# Altium PCB Ada4Arm.PcbDoc
Units mil, origin at the board's own origin, x right, y up, seen from the top; angles counter-clockwise.
Board outline 4750 x 3250 mil, 2 copper layers (Top Layer, Bottom Layer), stack 65.792 mil thick; 28 components, 71 nets, 297 pads, 0 vias.
Unrouted connection lines stored in the file: 94.
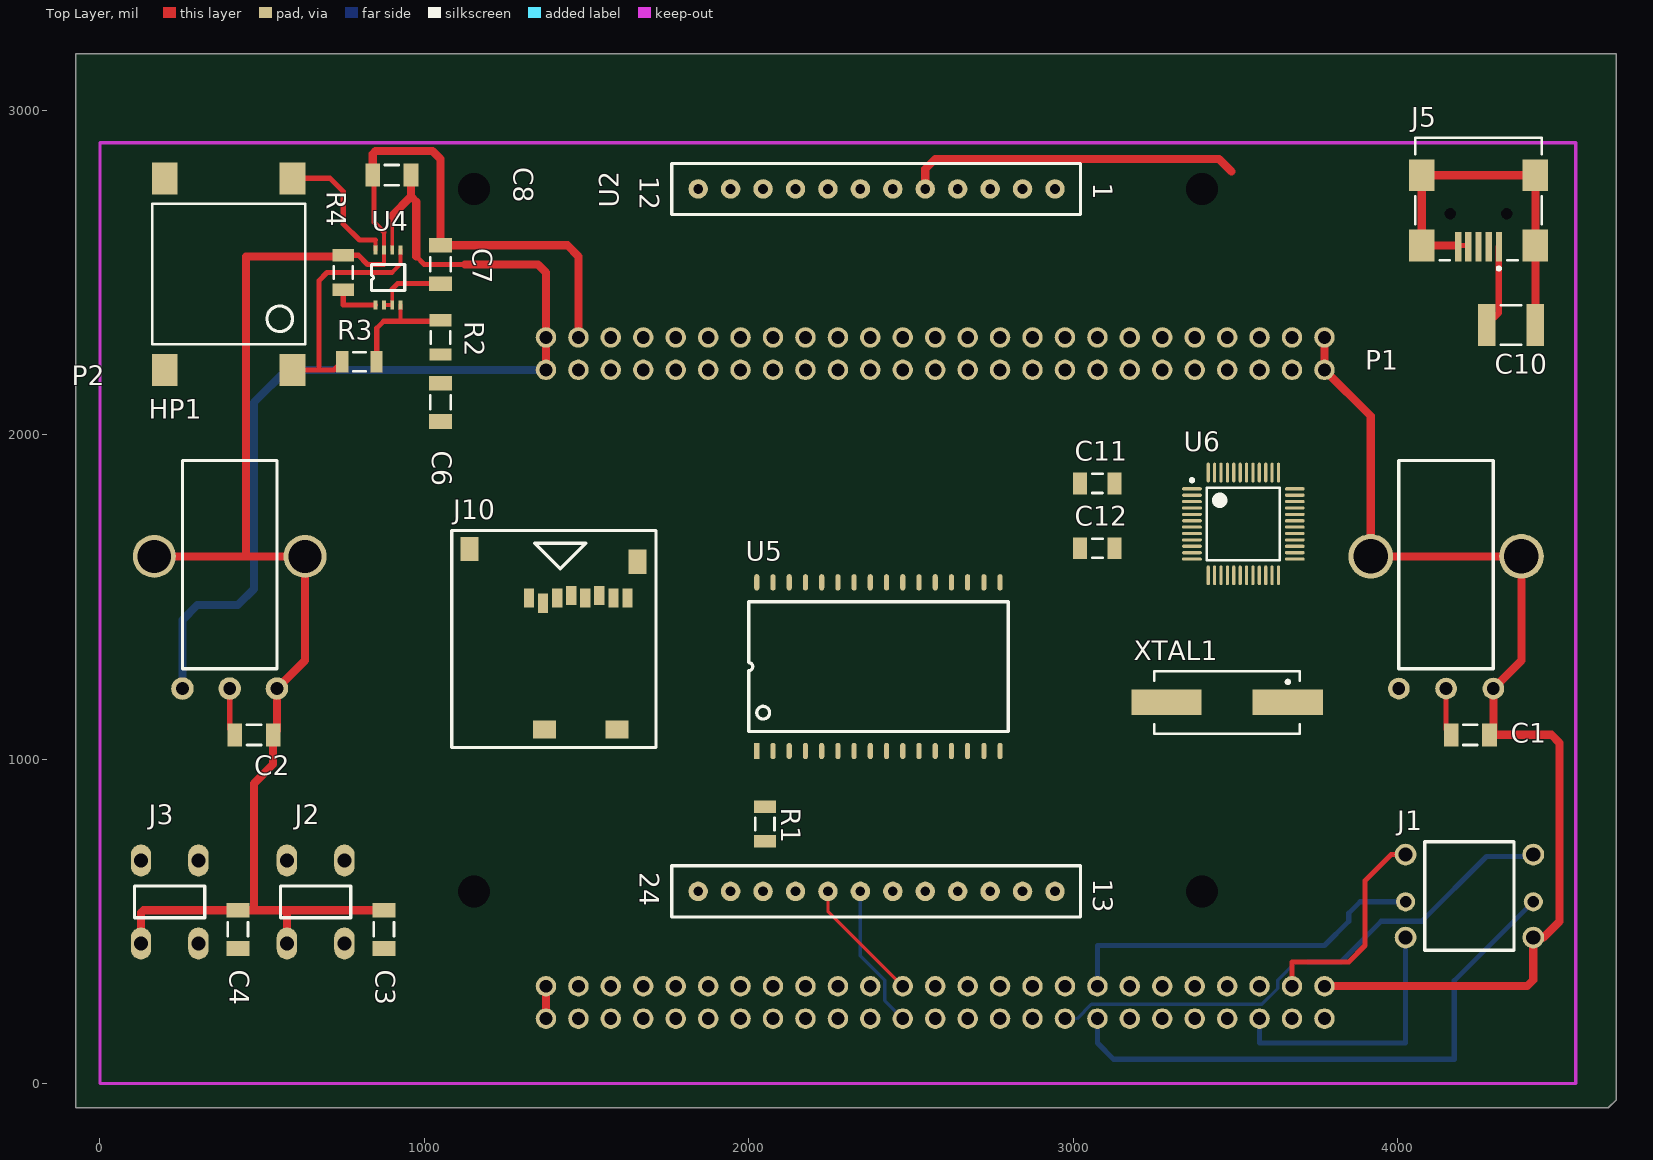
[diagram p0: Top Layer view]
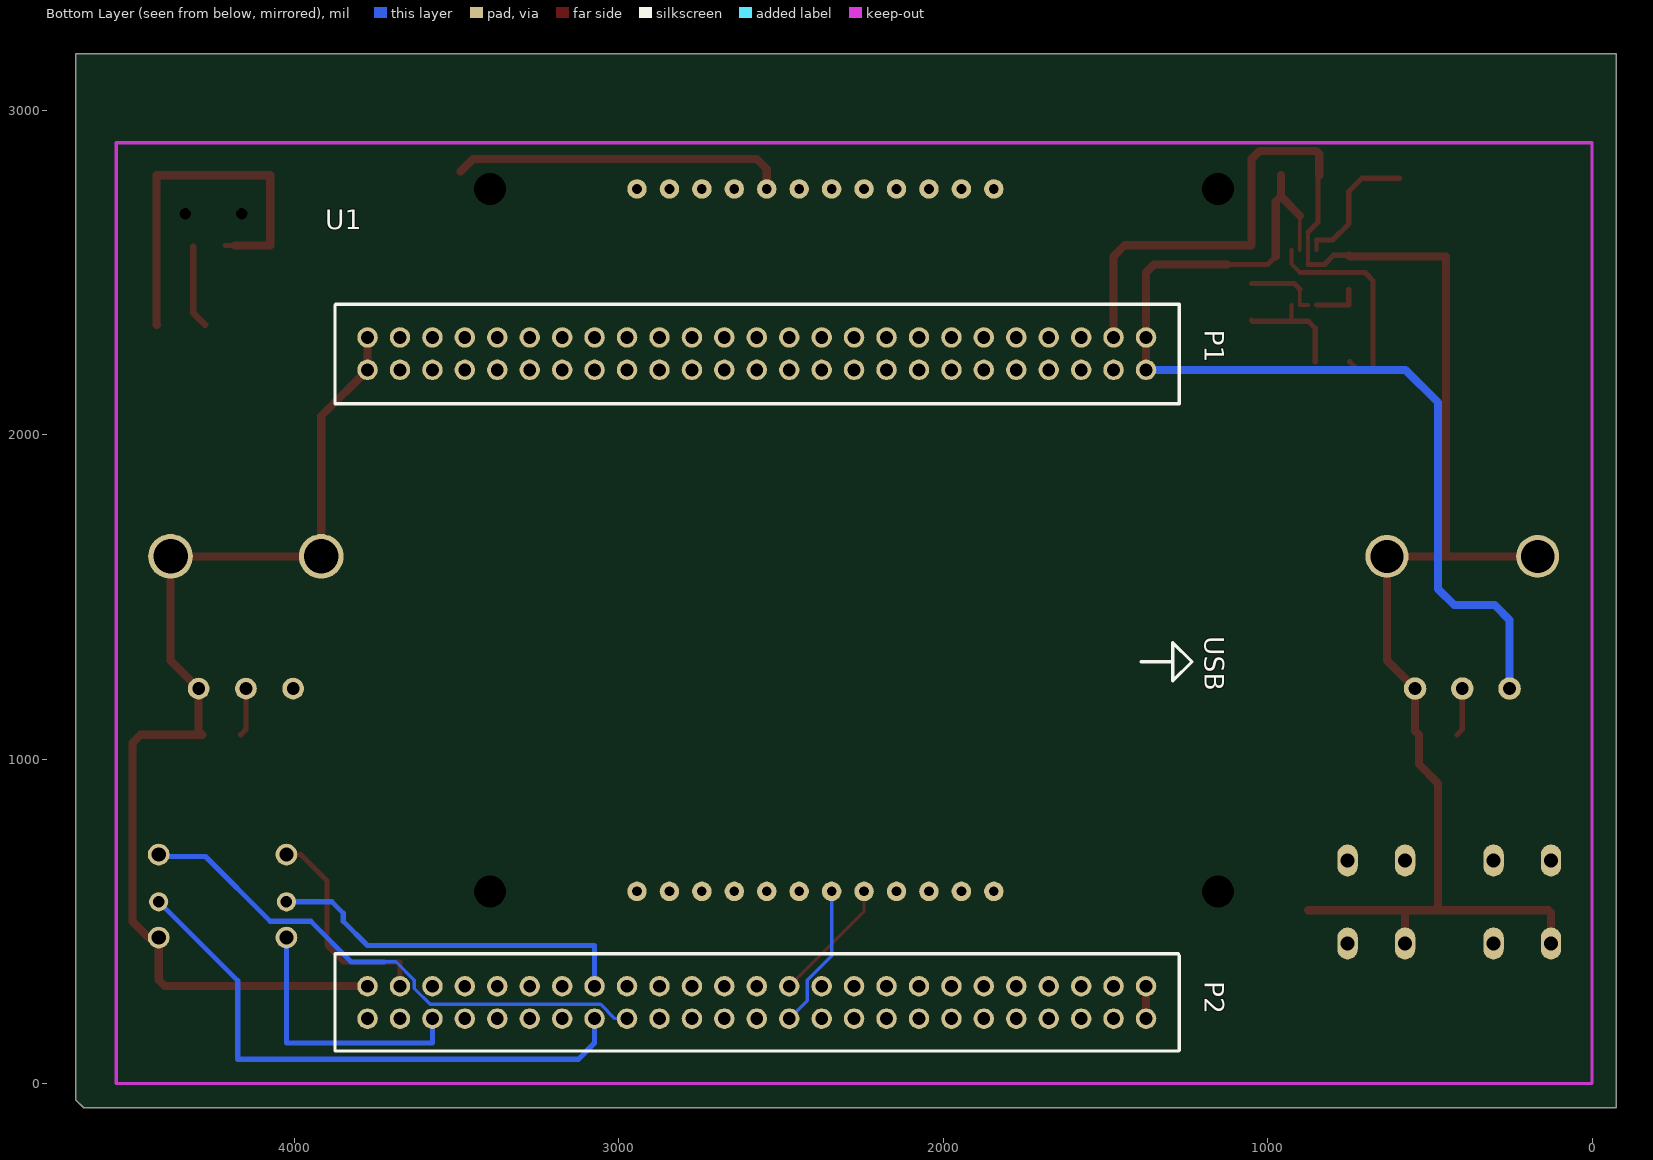
[diagram p1: Bottom Layer view, seen from below]

## Layer stack, top to bottom
Top Layer: signal copper 1.4
Dielectric: core 62.9921, FR-4, Dk 4.8
Bottom Layer: signal copper 1.4

## Board outline
-75,3175 4675,3175 4675,-50 4650,-75 -75,-75

## Design rules (kind name [scope] priority, off if disabled: settings)
Clearance "Polygon Clearance" [InPolygon] p1: gap=16
Clearance [All] p2: gap=7.87
ComponentClearance [All] p1 off: gap=10 collisioncheckmode=3 verticalgap=10 showdistances=FALSE
DiffPairsRouting [All] p1: maxlimit=393.7 minlimit=4.92 mostfreqgap=5.91 maxuncoupledlength=500
FabricationTestPointUsage FabricationTestPointUsage_1 [All] p1: valid=0 allowmultiple=FALSE
FabricationTestpoint FabricationTestpoint_1 [All] p1: side=3 testpointundercomponent=TRUE minsize=40 maxsize=100 preferedsize=60 minholesize=0 maxholesize=40 preferedholesize=32 testpointgrid=1 allowsidetop=TRUE allowsidebottom=TRUE usegrid=TRUE gridtolerance=0.01
HoleSize [All] p1: absolutevalues=TRUE maxlimit=236.22 minlimit=7.87 maxpercent=80.000 minpercent=20.000
HoleSize FabricationTestpoint [All] p2 off: absolutevalues=TRUE maxlimit=100 minlimit=1 maxpercent=80.000 minpercent=20.000
HoleSize FabricationTestPointUsage [All] p3 off: absolutevalues=TRUE maxlimit=100 minlimit=1 maxpercent=80.000 minpercent=20.000
MinimumSolderMaskSliver [All] p1: minsoldermaskwidth=1.93
PlaneClearance [All] p1: clearance=19.68
PlaneConnect [All] p1: planeconnectstyle=Relief reliefexpansion=15.75 reliefentries=4 reliefconductorwidth=5.91 reliefairgap=5.91
PolygonConnect [All] p1: connectstyle=Relief reliefconductorwidth=5.91 reliefentries=4 polygonreliefangle="90 Angle" airgapwidth=10
RoutingCorners [All] p1: cornerstyle=45-Degree minsetback=49.21 maxsetback=49.21
RoutingVias [All] p1: holewidth=23.62 width=34 viastyle="Through Hole" minholewidth=7.87 minwidth=18 maxholewidth=78.74 maxwidth=86.61
SilkscreenOverComponentPads [All] p1: minsilkscreentomaskgap=10
SolderMaskExpansion [All] p1: expansion=2.95
Width [All] p1: maxlimit=393.7 minlimit=8 preferedwidth=16
18 further rules are at their usual default settings.

## Classes and differential pairs
component class Audio_Keys: C1 C2 C3 C4 C6 C7 C8 HP1 J1 J2 J3 P1 P2 R2 R3 R4 U4
component class LCD_SRAM: R1 U2 U5
component class MCU: U1
net class A[0..18]: A0 A1 A2 A3 A4 A5 A6 A7 A8 A9 A10 A11 A12 A13 A14 A15 A16 A17 A18
net class D[0..7]: D0 D1 D2 D3 D4 D5 D6 D7
component class Power_Debug: C10 C11 C12 J5 J10 U6 XTAL1

## Components (designator, comment, footprint, x,y, rotation, side; value= is the part's Value field where it differs from the comment)
C1 "CAP 100nF 16V 1206(3216)" CAPC1206(3216)100_N 4225,1075 r180 top
C2 "CAP 100nF 16V 1206(3216)" CAPC1206(3216)100_N 475,1075 r180 top
C3 "CAP 100nF 16V 1206(3216)" CAPC1206(3216)100_N 875,475 r270 top
C4 "CAP 100nF 16V 1206(3216)" CAPC1206(3216)100_N 425,475 r270 top
C6 "CAP 100nF 16V 1206(3216)" CAPC1206(3216)100_N 1050,2100 r270 top
C7 "CAP 100nF 16V 1206(3216)" CAPC1206(3216)100_N 1050,2525 r90 top
C8 "CAP 100nF 16V 1206(3216)" CAPC1206(3216)100_N 900,2800 r180 top
C10 "Cap Pol3" CAPC4532L 4350,2338.58 r0 top
C11 "Cap Semi" CAPC3216L 3075,1850 r0 top
C12 "Cap Semi" CAPC3216L 3075,1650 r0 top
HP1 "NDT-03C" NDT-03C 200,2200 r90 top
J1 "SKQUCAA010" SKQUCAA010 4025,450 r0 top
J2 "SPST MicroSwitch" SPST_MicroSwitch 675,550 r90 top
J3 "SPST MicroSwitch" SPST_MicroSwitch 225,550 r90 top
J5 "440247-1" 440247 4250,2888.58 r90 top
J10 "3M microSD connector" 2908-05WB-MG 1675,1075 r0 top
P1 "POT Type 51" "POT Type 51"#1 4150,1625 r0 top
P2 "POT Type 51" "POT Type 51"#2 400,1625 r0 top
R1 "10K" RESC1206(3216)_L 2050,800 r270 top
R2 "10K" RESC1206(3216)_L 1050,2300 r90 top
R3 "10K" RESC1206(3216)_L 800,2225 r180 top
R4 "10K" RESC1206(3216)_L 750,2500 r270 top
U1 "STM32F3-DISCOVERY" STM32F3-DISCOVERY 2375,1300 r270 bottom
U2 "INT024BTFT" INT024BTFT 2275,1675 r270 top
U4 "TS4990" MiniSOP-8 850,2400 r90 top
U5 "AS64C4008" SOP32 2025,1025 r90 top
U6 "STM32F103C4T6A" LQFP48_L 3525,1725 r0 top
XTAL1 "HC49/4H_SMX" HC49/4H_SMX 3475,1175 r180 top

## Footprints (in the part's own frame and the unit in brackets; to place one, negate y for a bottom-side part, rotate by r counter-clockwise, add the part's x,y. Pads: shape width x height; smd on the part's side, far side on the other; paste and mask are expansions set on the pad)
2908-05WB-MG [mm] "Connecteur microSD"
  rect 0.8x1.5 smd: 1(-8.94,10.7) 2(-7.84,10.3) 3(-6.74,10.7) 4(-5.64,10.9) 5(-4.54,10.7) 6(-3.44,10.9) 7(-2.34,10.7) 8(-1.24,10.7)
  rect 1.8x1.4 smd: G0(-2.05,0.4) G1(-7.75,0.4)
  rect 1.4x1.9 smd: G2(-0.45,13.55) G3(-13.6,14.55)
  silkscreen extent -15,-1 1,16
440247 [mm] "Connector; USB2.0, Type B, SM; 5 Position; Right Angle"
  rect 2.3x0.5 smd: 1(-7.85,-1.6) 2(-7.85,-0.8) 3(-7.85,0) 4(-7.85,0.8) 5(-7.85,1.6)
  rect 2.5x2 smd: 6(-7.75,4.45) 7(-2.25,4.45) 8(-7.75,-4.45) 9(-2.25,-4.45)
  round 0.6 hole 0.9 unplated: MH1(-5.25,2.2) MH2(-5.25,-2.2)
  silkscreen extent -9.67,-4.95 0.7,4.95
CAPC1206(3216)100_N [mm] "Chip Capacitor, Body 3.2x1.6mm, Height 1mm, IPC Medium Density"
  rect 1.15x1.8 smd: 1(-1.5,0) 2(1.5,0)
  silkscreen extent -0.55,-0.8 0.55,0.8, body extent -1.7,-0.9 1.7,0.9, height 1
CAPC3216L [mm] "Chip Capacitor, Body 3.2x1.6mm, IPC High Density"
  rect 1.1x1.7 smd: 1(-1.35,0) 2(1.35,0)
  silkscreen extent -0.4,-0.75 0.4,0.75, body extent -1.7,-0.9 1.7,0.9, height 1.3
CAPC4532L [mm] "Chip Capacitor, Body 4.5x3.2mm, IPC High Density"
  rect 1.4x3.3 smd: 1(-1.9,0) 2(1.9,0)
  silkscreen extent -0.8,-1.55 0.8,1.55, body extent -2.4,-1.7 2.4,1.7, height 1.4
HC49/4H_SMX [mm] "Surface Mount Quartz Crystal; Body 13.4 (inc. leads) x 4.9 mm (LxW max)"
  rect 5.5x2 smd: 1(-4.75,0) 2(4.75,0)
  silkscreen extent -5.7,-2.45 5.7,2.45
INT024BTFT [mil]
  round 60 hole 30: 1(-1082.68,669.29) 2(-1082.68,569.29) 3(-1082.68,469.29) 4(-1082.68,369.29) 5(-1082.68,269.29) 6(-1082.68,169.29) 7(-1082.68,69.29) 8(-1082.68,-30.71) 9(-1082.68,-130.71) 10(-1082.68,-230.71) 11(-1082.68,-330.71) 12(-1082.68,-430.71) 13(1082.68,669.29) 14(1082.68,569.29) 15(1082.68,469.29) 16(1082.68,369.29) 17(1082.68,269.29) 18(1082.68,169.29) 19(1082.68,69.29) 20(1082.68,-30.71) 21(1082.68,-130.71) 22(1082.68,-230.71) 23(1082.68,-330.71) 24(1082.68,-430.71)
  round 60 hole 98.43 unplated: D1(-1082.68,1122.05) D2(1082.68,1122.05) D3(1082.68,-1122.05) D4(-1082.68,-1122.05)
  silkscreen extent -1161,-512 1161,748
LQFP48_L [mm] "Thin QFP, 48-Leads, Body 7x7mm, Pitch 0.5mm, IPC High Density"
  oval 1.55x0.25 smd: 1(-4.025,2.75) 2(-4.025,2.25) 3(-4.025,1.75) 4(-4.025,1.25) 5(-4.025,0.75) 6(-4.025,0.25) 7(-4.025,-0.25) 8(-4.025,-0.75) 9(-4.025,-1.25) 10(-4.025,-1.75) 11(-4.025,-2.25) 12(-4.025,-2.75) 25(4.025,-2.75) 26(4.025,-2.25) 27(4.025,-1.75) 28(4.025,-1.25) 29(4.025,-0.75) 30(4.025,-0.25) 31(4.025,0.25) 32(4.025,0.75) 33(4.025,1.25) 34(4.025,1.75) 35(4.025,2.25) 36(4.025,2.75)
  oval 0.25x1.55 smd: 13(-2.75,-4.025) 14(-2.25,-4.025) 15(-1.75,-4.025) 16(-1.25,-4.025) 17(-0.75,-4.025) 18(-0.25,-4.025) 19(0.25,-4.025) 20(0.75,-4.025) 21(1.25,-4.025) 22(1.75,-4.025) 23(2.25,-4.025) 24(2.75,-4.025) 37(2.75,4.025) 38(2.25,4.025) 39(1.75,4.025) 40(1.25,4.025) 41(0.75,4.025) 42(0.25,4.025) 43(-0.25,4.025) 44(-0.75,4.025) 45(-1.25,4.025) 46(-1.75,4.025) 47(-2.25,4.025) 48(-2.75,4.025)
  silkscreen extent -4.15,-2.85 2.85,3.55, body extent -3.5,-3.5 3.5,3.5, height 1.6
MiniSOP-8 [mm]
  rect 0.7x0.3 smd: 1(0,0) 2(0,-0.65) 3(0,-1.3) 4(0,-1.95) 5(4.3,-1.95) 6(4.3,-1.3) 7(4.3,-0.65) 8(4.3,0)
  silkscreen extent 1.14,-2.28 3.16,0.33
NDT-03C [mm]
  rect 2.5x2 smd: 1(0,0) 2(0,-10) 3(15,-10) 4(15,0)
  silkscreen extent 2,-11 13,1
"POT Type 51"#1 [mm]
  round 1.7 hole 1: 1(-3.7,-10.35) 2(0,-10.35) 3(3.7,-10.35)
  round 3.5 hole 2.7: 4(-5.9,0) 5(5.9,0)
  silkscreen extent -3.7,-8.8 3.7,7.5
"POT Type 51"#2 [mm]
  round 1.762 hole 1: 1(-3.7,-10.35) 2(0,-10.35) 3(3.7,-10.35)
  round 3.362 hole 2.6: 4(-5.9,0) 5(5.9,0)
  silkscreen extent -3.7,-8.8 3.7,7.5
RESC1206(3216)_L [mm] "Chip Resistor, Body 3.2x1.6mm, IPC High Density"
  rect 0.95x1.7 smd: 1(-1.35,0) 2(1.35,0)
  silkscreen extent -0.5,-0.75 0.5,0.75, body extent -1.67,-0.87 1.67,0.87, height 0.75
SKQUCAA010 [mm] "4 ways + Center switch"
  round 1.7 hole 1.1: 1(0,6.5) 3(0,0) 4(10,0) 6(10,6.5)
  round 1.5 hole 0.9: 2(0,2.8) 5(10,2.8)
  silkscreen extent 1.5,-1 8.5,7.5
SOP32 [mil]
  rect 50x16 smd: 1(0,0)
  oval 50x16 smd: 2(0,-50) 3(0,-100) 4(0,-150) 5(0,-200) 6(0,-250) 7(0,-300) 8(0,-350) 9(0,-400) 10(0,-450) 11(0,-500) 12(0,-550) 13(0,-600) 14(0,-650) 15(0,-700) 16(0,-750) 17(520,-750) 18(520,-700) 19(520,-650) 20(520,-600) 21(520,-550) 22(520,-500) 23(520,-450) 24(520,-400) 25(520,-350) 26(520,-300) 27(520,-250) 28(520,-200) 29(520,-150) 30(520,-100) 31(520,-50) 32(520,0)
  silkscreen extent 60,-775 460,25
SPST_MicroSwitch [mm]
  oval 2.5x1.6 hole 1.1: 1(-3,2.5) 2(3.5,2.5) 3(-3,-2) 4(3.5,-2)
  silkscreen extent -1,-2.5 1.5,3
STM32F3-DISCOVERY [mm]
  round 1.6 hole 1: 1(-25.4,25.4) 2(-22.86,25.4) 3(-25.4,22.86) 4(-22.86,22.86) 5(-25.4,20.32) 6(-22.86,20.32) 7(-25.4,17.78) 8(-22.86,17.78) 9(-25.4,15.24) 10(-22.86,15.24) 11(-25.4,12.7) 12(-22.86,12.7) 13(-25.4,10.16) 14(-22.86,10.16) 15(-25.4,7.62) 16(-22.86,7.62) 17(-25.4,5.08) 18(-22.86,5.08) 19(-25.4,2.54) 20(-22.86,2.54) 21(-25.4,0) 22(-22.86,0) 23(-25.4,-2.54) 24(-22.86,-2.54) 25(-25.4,-5.08) 26(-22.86,-5.08) 27(-25.4,-7.62) 28(-22.86,-7.62) 29(-25.4,-10.16) 30(-22.86,-10.16) 31(-25.4,-12.7) 32(-22.86,-12.7) 33(-25.4,-15.24) 34(-22.86,-15.24) 35(-25.4,-17.78) 36(-22.86,-17.78) 37(-25.4,-20.32) 38(-22.86,-20.32) 39(-25.4,-22.86) 40(-22.86,-22.86) 41(-25.4,-25.4) 42(-22.86,-25.4) 43(-25.4,-27.94) 44(-22.86,-27.94) 45(-25.4,-30.48) 46(-22.86,-30.48) 47(-25.4,-33.02) 48(-22.86,-33.02) 49(-25.4,-35.56) 50(-22.86,-35.56) 51(25.4,25.4) 52(27.94,25.4) 53(25.4,22.86) 54(27.94,22.86) 55(25.4,20.32) 56(27.94,20.32) 57(25.4,17.78) 58(27.94,17.78) 59(25.4,15.24) 60(27.94,15.24) 61(25.4,12.7) 62(27.94,12.7) 63(25.4,10.16) 64(27.94,10.16) 65(25.4,7.62) 66(27.94,7.62) 67(25.4,5.08) 68(27.94,5.08) 69(25.4,2.54) 70(27.94,2.54) 71(25.4,0) 72(27.94,0) 73(25.4,-2.54) 74(27.94,-2.54) 75(25.4,-5.08) 76(27.94,-5.08) 77(25.4,-7.62) 78(27.94,-7.62) 79(25.4,-10.16) 80(27.94,-10.16) 81(25.4,-12.7) 82(27.94,-12.7) 83(25.4,-15.24) 84(27.94,-15.24) 85(25.4,-17.78) 86(27.94,-17.78) 87(25.4,-20.32) 88(27.94,-20.32) 89(25.4,-22.86) 90(27.94,-22.86) 91(25.4,-25.4) 92(27.94,-25.4) 93(25.4,-27.94) 94(27.94,-27.94) 95(25.4,-30.48) 96(27.94,-30.48) 97(25.4,-33.02) 98(27.94,-33.02) 99(25.4,-35.56) 100(27.94,-35.56)
  silkscreen extent -28,-38.1 30.48,29

## Part data
C1 C2 C3 C4 C6 C7 C8: library part CMP-1037-04185-1, "CAP 100nF 16V -20% to +80% 1206 (3216 Metric) Thickness 1mm SMD"
C10: "Polarized Capacitor (Surface Mount)"
C11 C12: "Capacitor (Semiconductor SIM Model)"
HP1: "Audio HP"
J1: "4 ways + center switch"
J2 J3: "SPST - MicroSwitch"
J5: "USB 2.0, Right Angle, SMT, B Type, Receptacle, 5 Position, Black"
P1 P2: "25mm Diameter potentiometer"
R1 R2 R3 R4: library part CMP-1014-00623-1, "10K 0.25W 1% 1206 (3216 Metric)  SMD"
U1: "STM32F3-Discovery"
U2: library part "LCD INT024BTFT"
U5: "SRAM 4Mbits 512K*8Bits 55 ns"
U6: "STM32 ARM-based 32-bit MCU Performance Line with 16 kB Flash, 6 kB Internal RAM, Internal Code A, -40 to +85°C Temperature, 48-Pin LQFP, Tray"
XTAL1: "Surface Mount Quartz Crystal"

## Nets (pads, with @x,y where several pads share a name; then routed paths per layer and width w, separated by ;. In a path a pad name is that pad's centre, name@x,y a point inside that pad or via, vN(x,y) a via of type N, cw(c..) or ccw(c..) an arc to the next point about the centre after c; other vN are vias at no path point)
5V: C10.1 J5.1 U1.51 U1.52 | length 356.6
  Top Layer w20: C10.1 4312.99,2376.38 J5.1
  Top Layer w25: U1.52 U1.51
A0: U1.83 U5.12
A1: U1.81 U5.11
A2: U1.82 U5.10
A3: U1.79 U5.9
A4: U1.80 U5.8
A5: U1.77 U5.7
A6: U1.78 U5.6
A7: U1.75 U5.5
A8: U1.40 U5.27
A9: U1.39 U5.26
A10: U1.42 U5.23
A11: U1.41 U5.25
A12: U1.44 U5.4
A13: U1.43 U5.28
A14: U1.46 U5.3
A15: U1.45 U5.31
A16: U1.9 U5.2
A17: U1.95 U5.30
A18: U1.88 U5.1
D0: U1.6 U2.11 U5.13
D1: U1.5 U2.12 U5.14
D2: U1.8 U2.13 U5.15
D3: U1.7 U2.14 U5.17
D4: U1.20 U2.15 U5.18
D5: U1.19 U2.16 U5.19
D6: U1.47 U2.17 U5.20
D7: U1.48 U2.18 U5.21
GND: C1.1 C2.1 C3.1 C4.1 C7.2 C8.2 C10.2 C11.2 C12.2 J1.4 J2.1 J3.1 J5.4 J5.5 J5.6 J5.7 J5.8 J5.9 J10.6 P1.3 P1.4 P1.5 P2.3 P2.4 P2.5 R4.1 U1.3 U1.49 U1.50 U1.99 U1.100 U2.5 U2.21 U4.7 U5.16 U6.8 U6.23 U6.35 U6.47 | length 11121.3
  Top Layer w12: 875,2525 875.59,2525.59 U4.7 875.59,2624.41
  Top Layer w16: R4.1 796.85,2553.15 825,2525 875,2525 ; C8.2@844.88,2800 844.88,2655.12 875.59,2624.41 ; J5.5@4183.07,2583.46 J5.4@4214.57,2583.46
  Top Layer w25: J3.1 126.57,526.57 134.06,534.06 C4.1 475,534.06 ; P2.4 450,1625 ; J2.1 576.57,523.43 565.94,534.06 ; R4.1 746.85,2550 450,2550 450,1625 ; C8.2 840.94,2865.57 850,2874.63 1025,2874.63 1049.63,2850 1050,2850 C7.2 1440.94,2584.06 1475,2550 U1.3 ; C3.1 565.94,534.06 ; U2.5 2544.29,2819.29 2575,2850 3450,2850 3488.58,2811.42 ; U1.99 4400,300 4418.7,318.7 J1.4 4450,450 4500,500 4500,1050 4475,1075 C1.1 4295.67,1086.61 P1.3 4382.28,1304.13 P1.5 P1.4 3917.72,2057.28 U1.50 U1.49 ; J5.5@4183.07,2583.46 J5.6 J5.7 J5.9 J5.8 4425.2,2338.98 C10.2 ; 450,1625 P2.5 632.28,1304.13 P2.3 545.67,1086.61 C2.1 534.06,984.06 475,925 475,534.06 ; 475,534.06 565.94,534.06
NetC1_2: C1.2 P1.2 U1.22 | length 149.1
  Top Layer w16: P1.2 4150,1090.94 C1.2
NetC2_2: C2.2 P2.2 U1.21 | length 149.1
  Top Layer w16: P2.2 400,1090.94 C2.2
NetC3_2: C3.2 J2.3 U1.60
NetC4_2: C4.2 J3.3 U1.57
NetC6_1: C6.1 R2.1
NetC6_2: C6.2 U1.16
NetC7_1: C7.1 U4.2 U4.3 | length 230.3
  Top Layer w12: U4.2 U4.3 901.18,2448.82
  Top Layer w16: 901.18,2448.82 918.31,2465.94 C7.1
NetC11_1: C11.1 U6.6 XTAL1.1
NetC12_1: C12.1 U6.5 XTAL1.2
NetHP1_2: HP1.2 R3.2 U4.5 | length 754.2
  Top Layer w12: 900,2500 926.77,2526.77 U4.5
  Top Layer w16: HP1.2 675,2200 ; R3.2 721.85,2200 675,2200 ; 900,2500 700,2500 675,2475 675,2200
NetHP1_3: HP1.3 U4.8 | length 424.5
  Top Layer w12: U4.8 850,2600
  Top Layer w16: HP1.3 709.45,2790.55 750,2750 750,2650 800,2600 850,2600
NetJ1_1: J1.1 U1.97 | length 679.2
  Top Layer w16: U1.97 3675,375 3850,375 3900,425 3900,625 3980.91,705.91 J1.1
NetJ1_2: J1.2 U1.85 | length 1145.7
  Bottom Layer w16: U1.85 3075,425 3775,425 3850,500 3850,525 3885.24,560.24 J1.2
NetJ1_3: J1.3 U1.96 | length 850
  Bottom Layer w16: U1.96 3575,125 4025,125 J1.3
NetJ1_5: J1.5 U1.86 | length 1781.9
  Bottom Layer w16: U1.86 3075,125 3125,75 4175,75 4175,316.54 J1.5
NetJ1_6: J1.6 U1.84 | length 1668.2
  Bottom Layer w10: U1.84 3012.25,200 3056.62,244.37 3582.12,244.37 3630.63,292.88 3630.63,318.38 3687.25,375 3725,375
  Bottom Layer w16: 3725,375 3825,375 3950,500 4075,500 4275,700 4412.8,700 J1.6
NetJ5_2: J5.2 U6.32
NetJ5_3: J5.3 U6.33
NetJ10_2: J10.2 U1.36
NetJ10_3: J10.3 U1.37
NetJ10_5: J10.5 U1.35
NetJ10_7: J10.7 U1.38
NetR1_2: R1.2 U2.22
NetR2_2: R2.2 R3.1 U4.4 | length 361.1
  Top Layer w12: 925,2350 926.77,2351.77 U4.4
  Top Layer w16: R3.1 853.15,2328.15 875,2350 925,2350 1046.85,2350 R2.2
NetR4_2: R4.2 U4.1 | length 146.9
  Top Layer w16: R4.2 750,2400 U4.1
NetU1_10: U1.10 U2.6
NetU1_11: U1.11 U6.12
NetU1_13: U1.13 U2.7
NetU1_14: U1.14 U6.13
NetU1_33: U1.33
NetU1_34: U1.34 U5.24
NetU1_53: U1.53 U2.9
NetU1_54: U1.54 U2.10
NetU1_58: U1.58
NetU1_67: U1.67 U5.22
NetU1_68: U1.68 U5.29
NetU1_73: U1.73 U2.20 | length 387.9
  Top Layer w10: U2.20 2244.29,530.71 U1.73
NetU1_74: U1.74 U2.19 | length 446.5
  Bottom Layer w10: U2.19 2344.29,393.46 2419.37,318.38 2419.37,255.63 U1.74
NetU1_89: U1.89 U2.8
NetU1_93: U1.93 U6.30
NetU1_94: U1.94 U6.31
VCC: C8.1 J10.4 P1.1 P2.1 R1.1 U1.1 U1.2 U2.1 U2.2 U2.3 U2.4 U4.6 U5.32 U6.1 U6.9 U6.24 U6.36 U6.44 U6.48 | length 3155.6
  Top Layer w12: 900,2675 901.18,2673.82 U4.6
  Top Layer w16: 975,2550 1000,2525 1125,2525
  Top Layer w25: 900,2675 959.06,2734.06 ; C8.1 959.06,2734.06 ; 975,2550 975,2718.11 959.06,2734.06 ; 1125,2525 1350,2525 1375,2500 U1.1 U1.2
  Bottom Layer w25: P2.1 254.33,1429.33 300,1475 425,1475 475,1525 475,2100 575,2200 U1.2
pads on no net: HP1.1 HP1.4 J2.2 J2.4 J3.2 J3.4 J5.MH1 J5.MH2 J10.1 J10.8 J10.G0 J10.G1 J10.G2 J10.G3 U1.4 U1.12 U1.15 U1.17 U1.18 U1.23 U1.24 U1.25 U1.26 U1.27 U1.28 U1.29 U1.30 U1.31 U1.32 U1.55 U1.56 U1.59 U1.61 U1.62 U1.63 U1.64 U1.65 U1.66 U1.69 U1.70 U1.71 U1.72 U1.76 U1.87 U1.90 U1.91 U1.92 U1.98 U2.23 U2.24 U2.D1 U2.D2 U2.D3 U2.D4 U6.2 U6.3 U6.4 U6.7 U6.10 U6.11 U6.14 U6.15 U6.16 U6.17 U6.18 U6.19 U6.20 U6.21 U6.22 U6.25 U6.26 U6.27 U6.28 U6.29 U6.34 U6.37 U6.38 U6.39 U6.40 U6.41 U6.42 U6.43 U6.45 U6.46

## Keep-outs
Keep-Out Layer:
  lines w10: 7615,8155 7645,8185 ; 0,0 4550,0 4550,2900 0,2900 0,0

## Text inside footprints (layer, text, board x,y; h text height)
J5: Mechanical 1 "PCB Edge" at 4408.91,2905.6 h9.84 r180
U1: Bottom Overlay "P1" at 1193.9,2323.62 h60 r90; Bottom Overlay "P2" at 1193.9,315.75 h60 r90; Bottom Overlay "USB" at 1193.9,1378.74 h60 r90
U2: Top Overlay "1" at 3062.4,2777.36 h60 r270; Top Overlay "12" at 1664.76,2797.05 h60 r270; Top Overlay "13" at 3062.4,631.69 h60 r270; Top Overlay "24" at 1664.76,651.38 h60 r270